# Altium PCB Voltage_Regulator_pcb.PcbDoc
Units mm, origin at the board's own origin, x right, y up, seen from the top; angles counter-clockwise.
Board outline 36 x 24.5 mm, 2 copper layers (Top Layer, Bottom Layer); 17 components, 9 nets, 38 pads, 7 vias.
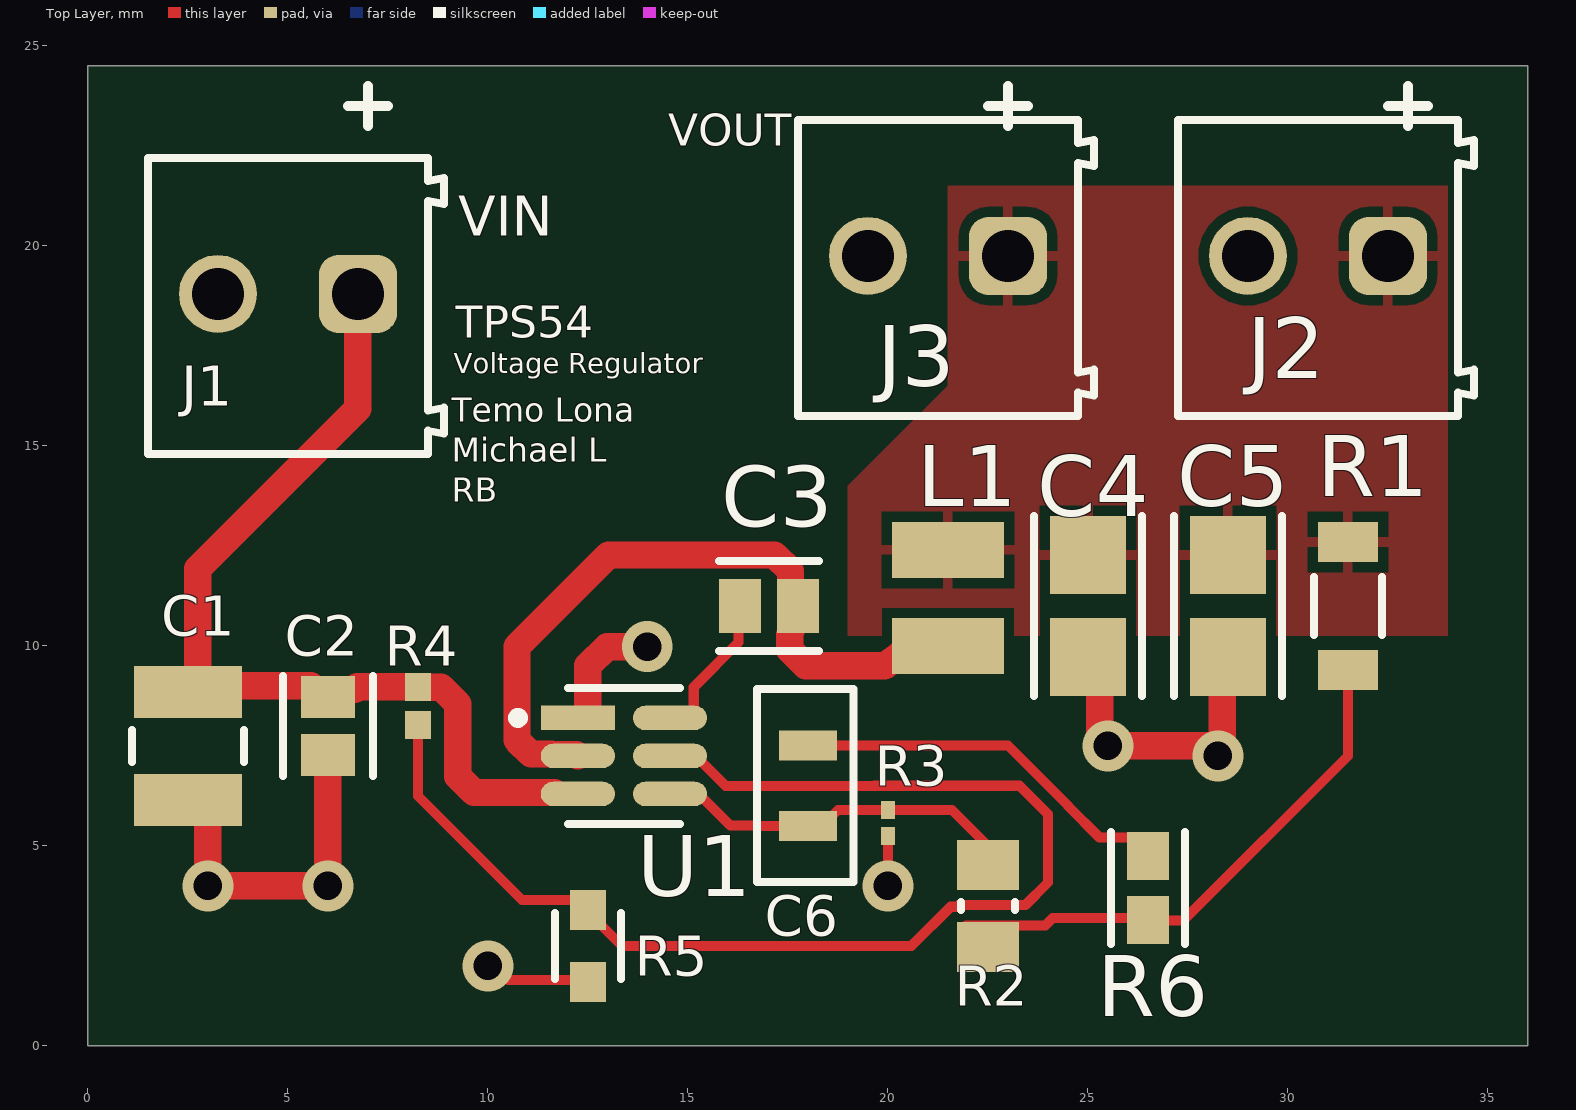
[diagram p0: Top Layer view]
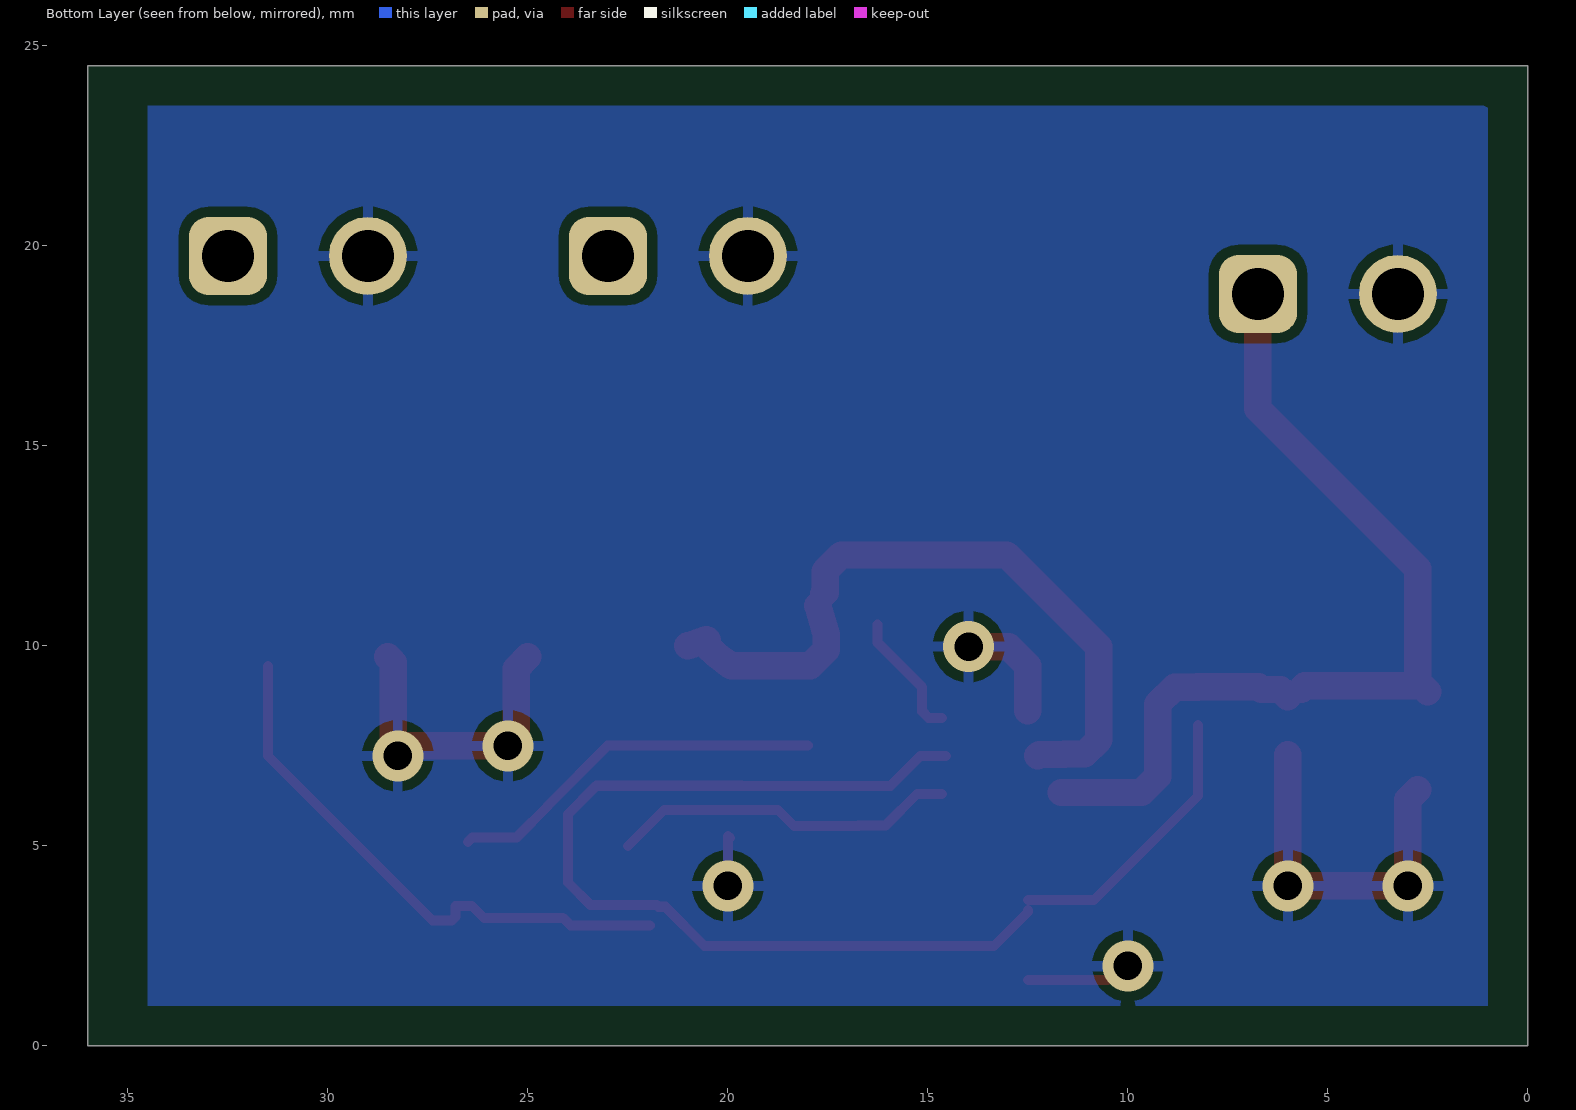
[diagram p1: Bottom Layer view, seen from below]
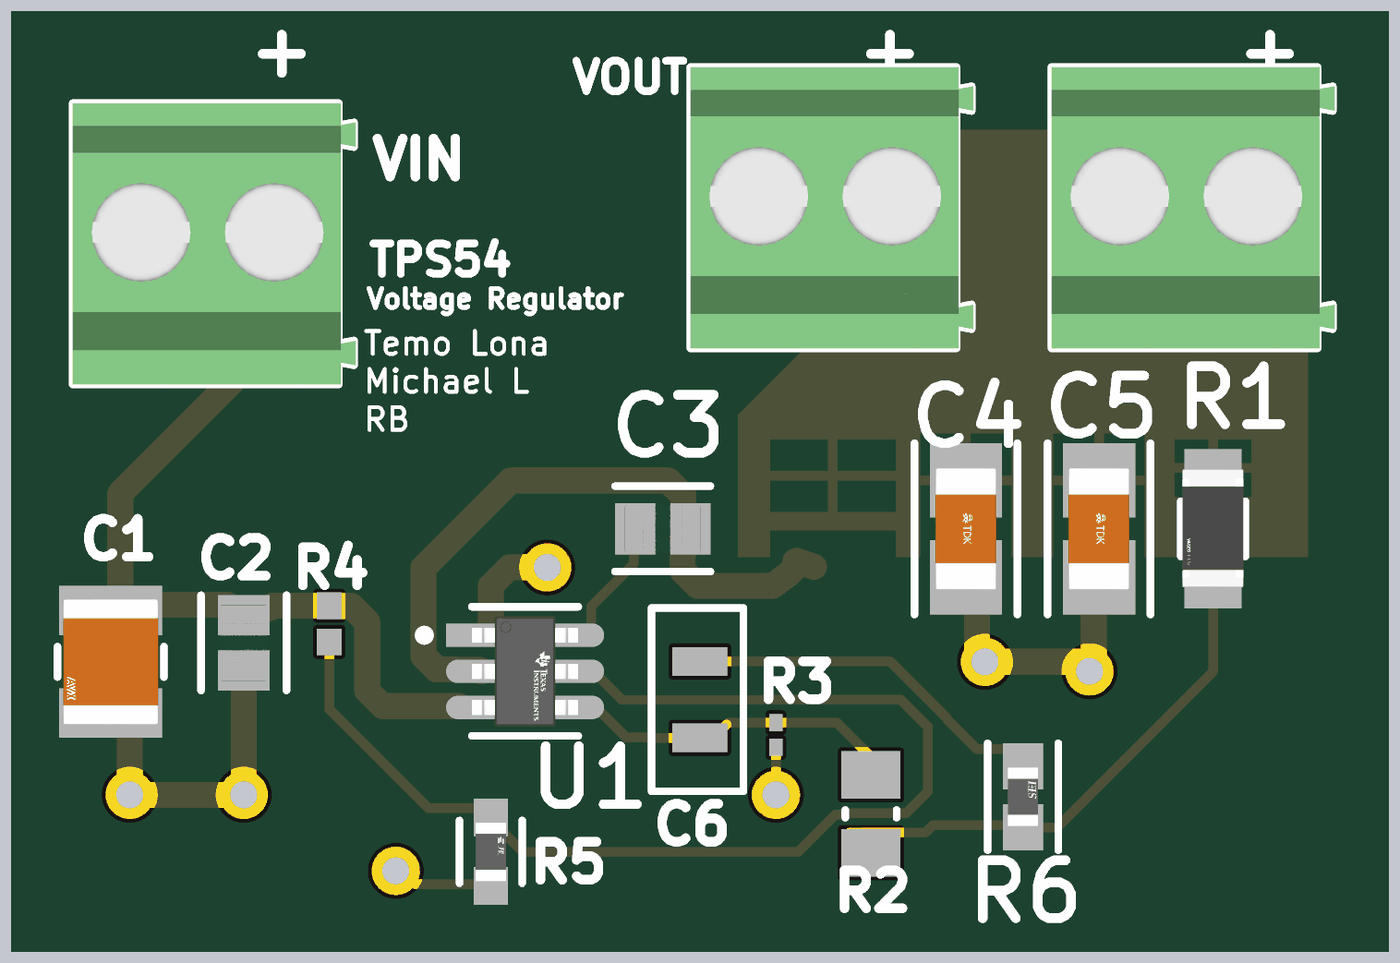
[diagram p2: 3D render of the assembled board from above, using the file's embedded part models]

## Layer stack, top to bottom
Top Solder: solder mask 0.0102, Solder Resist, Dk 3.5
Top Layer: signal copper 0.0356
Dielectric 1: dielectric 0.32, FR-4, Dk 4.8
Bottom Layer: signal copper 0.0356
Bottom Solder: solder mask 0.0102, Solder Resist, Dk 3.5

## Board outline
0,24.5 36,24.5 36,0 0,0

## Design rules (kind name [scope] priority, off if disabled: settings)
Clearance [All] p1: gap=0.254 ignorepadtopadclearanceinfootprint=FALSE except(0: Arc-Hole Track-Hole SMDPad-Hole THPad-Hole Via-Hole Fill-Hole Poly-Hole Region-Hole Text-Hole)
PolygonConnect [All] p1: connectstyle=Relief reliefconductorwidth=0.254 reliefentries=4 polygonreliefangle="90 Angle" airgapwidth=0.254
RoutingVias [All] p1: holewidth=0.711 width=1.27 viastyle="Through Hole" minholewidth=0.711 minwidth=1.27 maxholewidth=0.711 maxwidth=1.27
SolderMaskExpansion [All] p1: expansion=0.102 istentingtop=FALSE
Width [All] p1: maxlimit=0.254 minlimit=0.254 preferedwidth=0.254
30 further rules are at their usual default settings.

## Components (designator, comment, footprint, x,y, rotation, side; value= is the part's Value field where it differs from the comment)
C1 "12103G106ZAT2A" FP-1210-L_3_3_0_4-W_2_5_0-IPC_C 2.5,7.5 r270 top
C2 "CL21F104ZAANNNC" FP-CL21-IPC_C 6,8 r270 top
C3 "CL21F104ZAANNNC" FP-CL21-IPC_C 17.024,11 r0 top
C4 "C3216X6S0J226M160AB" FP-C3216-160-0_2-IPC_A 25,11 r270 top
C5 "C3216X6S0J226M160AB" FP-C3216-160-0_2-IPC_A 28.5,11 r270 top
C6 "75pF C" "75pF C" 18,7.51 r270 top
J1 "691214110002" 691214110002 5,18.5 r180 top
J2 "691214110002" 691214110002 30.75,19.45 r180 top
J3 "691214110002" 691214110002 21.25,19.45 r180 top
L1 "10uH" WE-LQ_1210 -1248.5,1281.2 r90 top
R1 "" FP-RT1206-MFG 31.5,11 r270 top value=49.9Ω
R2 "100k" RESC2013X50X30ML20T20 22.5,3.5 r270 top
R3 "13.3k" RESC0603X28X15NL05T05 20,5.575 r90 top
R4 "511k" RESC1005X40X25ML05T10 8.25,8.5 r90 top
R5 "105k" FP-CPF0603-MFG 12.5,2.5 r270 top value=105KΩ
R6 "2k" FP-RMCF0603-IPC_A 26.5,3.949 r90 top
U1 "TPS54308DDCT" FP-DDC0006A-IPC_A 13.4,7.25 r0 top (schematic designator U?)

## Footprints (in the part's own frame and the unit in brackets; to place one, negate y for a bottom-side part, rotate by r counter-clockwise, add the part's x,y. Pads: shape width x height; smd on the part's side, far side on the other; paste and mask are expansions set on the pad)
"75pF C" [mm]
  rect 0.75x1.45 smd: +(0,0) -(2.01,0)
  silkscreen extent -1.41,-1.27 3.42,1.14
691214110002 [mm] "3.50 mm Horizontal Entry Modular, 2p"
  rrect50% 1.95x1.95 hole 1.3: 1(-1.75,-0.3)
  round 1.95 hole 1.3: 2(1.75,-0.3)
  silkscreen extent -3.9,-3.7 3.5,3.7, body extent -3.95,-3.7 3.5,3.7, height 8.55
FP-1210-L_3_3_0_4-W_2_5_0-IPC_C [mm]
  rect 1.303x2.704 smd paste+0 mask+0: 1(-1.35,0) 2(1.35,0)
  silkscreen extent -0.4,-1.4 0.4,1.4, body extent -2.1,-1.5 2.1,1.5, height 0.25
FP-C3216-160-0_2-IPC_A [mm]
  rect 1.954x1.906 smd paste+0 mask+0: 1(-1.276,0) 2(1.276,0)
  silkscreen extent -2.25,-1.35 2.25,1.35, body extent -2.75,-1.45 2.75,1.45, height 0.25
FP-CL21-IPC_C [mm]
  rect 1.055x1.356 smd paste+0 mask+0: 1(-0.726,0) 2(0.726,0)
  silkscreen extent -1.25,-1.12 1.25,1.12, body extent -1.35,-0.82 1.35,0.82, height 0.25
FP-CPF0603-MFG [mm]
  rect 1x0.9 smd paste+0 mask+0: 1(-0.9,0) 2(0.9,0)
  silkscreen extent -0.82,-0.82 0.82,0.82, body extent -1.5,-0.55 1.5,0.55, height 0.25
FP-DDC0006A-IPC_A [mm]
  rect 1.854x0.612 smd paste+0 mask+0: 1(-1.15,0.95)
  rrect100% 1.854x0.612 smd paste+0 mask+0: 2(-1.15,0) 3(-1.15,-0.95) 4(1.15,-0.95) 5(1.15,0) 6(1.15,0.95)
  silkscreen extent -2.77,-1.7 1.4,1.7, body extent -2.58,-1.95 2.58,1.95, height 0.25
FP-RMCF0603-IPC_A [mm]
  rect 1.206x1.058 smd paste+0 mask+0: 1(-0.801,0) 2(0.801,0)
  silkscreen extent -1.4,-0.93 1.4,0.93, body extent -1.9,-1.03 1.9,1.03, height 0.25
FP-RT1206-MFG [mm]
  rect 1x1.5 smd paste+0 mask+0: 1(-1.6,0) 2(1.6,0)
  silkscreen extent -0.72,-0.85 0.72,0.85, body extent -2.2,-0.95 2.2,0.95, height 0.25
RESC0603X28X15NL05T05 [mm] "Chip Resistor, 2-Leads, Body 0.60x0.30mm, IPC Medium Density"
  rect 0.45x0.35 smd: 1(-0.325,0) 2(0.325,0)
  body extent -0.33,-0.17 0.33,0.18, height 0.28
RESC1005X40X25ML05T10 [mm] "Chip Resistor, 2-Leads, Body 1.00x0.50mm, IPC Low Density"
  rect 0.7x0.65 smd: 1(-0.475,0) 2(0.475,0)
  body extent -0.53,-0.27 0.53,0.28, height 0.4
RESC2013X50X30ML20T20 [mm] "Chip Resistor, 2-Leads, Body 2.00x1.25mm, IPC Low Density"
  rect 1.25x1.55 smd: 1(-1.025,0) gg(1.025,0)
  silkscreen extent -0.1,-0.67 0.1,0.67, body extent -1.1,-0.72 1.1,0.72, height 0.5
WE-LQ_1210 [mm] "SMT Inductor, body 3.2x2.5mm"
  rect 1.4x2.8 smd: 1(-1271.2,-1270) 2(-1268.8,-1270)
  body extent -1271.6,-1271.25 -1268.4,-1268.75, height 1.99

## Part data
C1: library part CMP-04427-006279-1, "General Purpose Ceramic Capacitor, 1210, 10uF, +80%/-20%, Y5V, +22%/-82%, 25V", Capacitance=10uF, Case Code (Imperial)=1210, Case Code (Metric)=3225, Dielectric=Y5V, Max Operating Temperature=85°C, Min Operating Temperature=-30°C, Package Quantity=2000, Tolerance=80%, Voltage Rating=25V, Case/Package=1210, Construction=Flat, Contact Plating=Tin, Depth=2.5mm, Lead Free="Lead Free", Length=3.2mm, Mount="Surface Mount", Number of Pins=2, Packaging="Tape and Reel", Radiation Hardening=No, REACH SVHC="No SVHC", RoHS Compliant=Yes, Series=1210, Termination=SMD/SMT, Thickness=0.09inch, Voltage Rating (DC)=25V, Width=0.098inch
C2 C3: library part CMP-13271-002094-1, "CL21 Series 0805 100nF 25V -20/+80% Tolerance Y5V Multilayer Ceramic Chip Capacitor", Capacitance=100nF, Case Code (Imperial)=0805, Case Code (Metric)=2012, Dielectric=Y5V, Max Operating Temperature=85°C, Min Operating Temperature=-30°C, Package Quantity=1, Tolerance=80%, Voltage Rating=25V, Case/Package=0805, Depth=1.25mm, Height=0.65mm, Lead Free="Lead Free", Length=2mm, Mount="Surface Mount", Packaging="Tape and Reel", Radiation Hardening=No, Thickness=0.03inch, Voltage Rating (DC)=25V, Width=0.049inch
C4 C5: library part CMP-08246-004893-1, "Multilayer Ceramic Capacitors 22uF ±20% 6.3V X6S SMD 1206", Capacitance=22uF, Case Code (Imperial)=1206, Case Code (Metric)=3216, Dielectric Material=Ceramic, Max Operating Temperature=105°C, Min Operating Temperature=-55°C, Package Quantity=2000, Tolerance=20%, Voltage Rating=6.3V, Case/Package=1206, Lead Free="Lead Free", Length=0.126inch, Mount="Surface Mount", Packaging="Tape and Reel", RoHS Compliant=Yes, Series=C, Thickness=0.071inch, Voltage Rating (DC)=6.3V, Width=0.063inch
J1 J2 J3: library part CMP-1502-02464-2, Color="Blue, Green", Current=10A, Max Operating Temperature=105°C, Min Operating Temperature=-40°C, Voltage=300V, Contact Material=Brass, Contact Plating="Brass, Tin", Current Rating=10A, Height=8.7mm, Housing Material=Nylon, Lead Pitch=3.5mm, Length=7.4mm, Mount="Through Hole", NexarPartId=18818288, Number of Contacts=2, Number of Levels=1, Number of Pins=2, Number of Positions Per Level=2, Number of Rows=1, Packaging=Box, Pitch=3.5052mm, Plating="Brass, Steel", REACH SVHC=Unknown, RoHS=Compliant, Stripping Length=-6mm, Termination=Screw, Voltage Rating=300V, Width=7.9mm, Wire Gauge (Max)=24AWG, Wire Gauge (Min)=16AWG, Wire/Cable Gauge=24AWG
L1: library part CMP-0227-00457-2, Ambient Temperature Range High=85°C, Ambient Temperature Range Low=-40°C, Case Code (Imperial)=1210, Case Code (Metric)=3225, Current Rating=320mA, DC Resistance (DCR)=650mΩ, Inductance=10µH, Inductance Tolerance=20%, Max Operating Temperature=125°C, Saturation Current=850mA, Self Resonant Frequency=20MHz, Test Frequency=1MHz, Case/Package=1210, Composition=Wirewound, Core Material=Ferrite, Height=2mm, Height - Seated (Max)=2.3114mm, Length=3.2mm, Max DC Current=320mA, Min Operating Temperature=-40°C, Mount="Surface Mount", NexarPartId=14415811, Packaging="Tape & Reel (TR)", Q Factor=35, REACH SVHC=Unknown, RMS Current (Irms)=320mA, RoHS=Compliant, Shielding=Unshielded, Termination=SMD/SMT, Tolerance=20%, Width=2.5mm
R1: library part CMP-03412-015593-1, "RES SMD 49.9 OHM 0.5% 1/4W 1206", Manufacturer=Yageo, Manufacturer Part Number=RT1206DRD0749R9L, Package=RT1206, Power Rating=0.25W, Resistance=49.9Ω, Temperature="-55°C to +155°C", Temperature Coefficient="25 ppm/°C", Temperature Range High=+155°C, Temperature Range Low=-55°C, Tolerance=0.0001, Voltage Rating=200V, Automotive=No, Category=Res, ComponentLink2Description=Datasheet, ComponentLink2URL=http://www.yageo.com/documents/recent/PYu-RT_1-to-0.01_RoHS_L_9.pdf, Composition="Thin Film", Device Class L1="Passive Components", Device Class L2=Resistors, Device Class L3="Chip SMD Resistors", Digikey Description="RES SMD 49.9 OHM 0.5% 1/4W 1206", Footprint Url=http://www.yageo.com/exep/pages/download/literatures/PYu-R_Mount_10.pdf, Height=0.65mm, Ipc Land Pattern Name=RESC310160X55, Lead Free=Yes, Mouser Description="Thin Film Resistors - SMD 1/4W 49.9 ohm .5% 25ppm", Octopart=https://octopart.com/rt1206drd0749r9l-yageo-1278218, RoHS=TRUE, Series=RT
R2: library part CMP-2001-04900-1, Manufacturer="Vishay Dale", Part Number=CRCW0805100KJNEA
R3: library part CMP-1010-00542-2, Manufacturer="Vishay Dale", Part Number=CRCW020113K3FKED
R4: library part CMP-2002-07728-1, Manufacturer="Yageo / Phycomp", Part Number=RC0402FR-07511KL
R5: library part CMP-03211-010980-1, "RES SMD 105KΩ 0.1% 1/16W 0603", Manufacturer="TE Connectivity", Manufacturer Part Number=CPF0603B105KE1, Package=CPF0603, Power Rating=0.063W, Resistance=105KΩ, Temperature="-55°C to +155°C", Temperature Coefficient=25ppm/°C, Temperature Range High=+155°C, Temperature Range Low=-55°C, Tolerance=0.1%, Voltage Rating=50V, Automotive=No, Category=Res, ComponentLink2Description=Datasheet, ComponentLink2URL=https://www.te.com/commerce/DocumentDelivery/DDEController?Action=showdoc&DocId=Data+Sheet%7F1773200%7FM%7Fpdf%7FEnglish%7FENG_DS_1773200_M.pdf%7F3-1676481-2, Composition="Thin Film", Device Class L1="Passive Components", Device Class L2=Resistors, Device Class L3="Chip SMD Resistors", Height=0.55mm, Ipc Land Pattern Name=RESC15580X45, Lead Free=Yes, Octopart=https://octopart.com/cpf0603b105ke1-te+connectivity-22739701, octopart_url=https://octopart.com/cpf0603b105ke1-te+connectivity-22739701, Packaging="1k Reel", RoHS=TRUE, Series=CPF
R6: library part CMP-26527-006357-1, "2kΩ ±1% 0.1W 0603 Thick Film Chip Resistor AEC-Q200 compliant", Case Code (Imperial)=0603, Case Code (Metric)=1608, Max Operating Temperature=155°C, Max Power Dissipation=100mW, Min Operating Temperature=-55°C, Resistance=2kR, Resistor Type="Thick Film", Temperature Coefficient=100ppm/°C, Tolerance=1%, Working Voltage=75V, Case/Package=0603, Construction=Rectangular, Contact Plating=Tin, Depth=0.8mm, Features="Automotive AEC-Q200", Height=0.022inch, Lead Free="Lead Free", Length=1.55mm, Military Standard=Not, Mount="Surface Mount", Number of Terminations=2, Packaging="Tape and Reel", Power Rating=100mW, Radiation Hardening=No, RoHS Compliant=Yes, Series=RMCF, Technology="THICK FILM", Width=0.031inch
U1: library part CMP-04918-000241-1, "IC REG BUCK ADJ 3A TSOT23-6", Case/Package=SOT-23-6, Max Input Voltage=28V, Max Operating Temperature=125°C, Max Output Voltage=26V, Min Input Voltage=4.5V, Min Operating Temperature=-40°C, Min Output Voltage=1V, Output Current=3A, Switching Frequency=350kHz, Mount="Surface Mount", Number of Outputs=1, Output Configuration=Positive, Output Type=Adjustable, Packaging="Tape and Reel", RoHS Compliant=Yes, Synchronous Rectifier=Yes

## Via types
v1: diameter 1.27, hole 0.711, Top Layer to Bottom Layer, 7 vias

## Nets (pads, with @x,y where several pads share a name; then routed paths per layer and width w, separated by ;. In a path a pad name is that pad's centre, name@x,y a point inside that pad or via, vN(x,y) a via of type N, cw(c..) or ccw(c..) an arc to the next point about the centre after c; other vN are vias at no path point)
GND: C1.2 C2.2 C4.2 C5.2 J1.2 J2.2 J3.2 R3.1 R5.2 U1.1 | length 23.1
  Top Layer w0.254: R3.1@19.952,5.202 R3.1
  Top Layer w0.256: v1(10,2) 10.158,2 10.508,1.65 R5.2@12.5,1.65 ; v1(20,4) R3.1
  Top Layer w0.686: C1.2@2.75,6.4 3,6.15 v1(3,4) v1(6,4) C2.2 ; U1.1@12.5,8.379 12.5,9.5 12.984,9.984 v1(13.984,9.984) ; C4.2 25.293,9.431 25.293,7.865 25.5,7.658 v1(25.5,7.5) v1@28,7.5 ; v1(28.25,7.25) 28.362,7.362 28.362,9.586 C5.2
NetC3_1: C3.1 U1.6 | length 3.2
  Top Layer w0.254: U1.6@14.65,8.2 14.979,8.2 15.144,8.365 15.144,8.969 16.265,10.09 C3.1@16.265,10.528
NetC3_2: C3.2 L1.1 U1.2 | length 17.7
  Top Layer w0.684: U1.2 12.214,7.286 11.593,7.286 11.581,7.298 11.076,7.298 10.727,7.647 10.727,9.977 13.024,12.274 17.164,12.274 17.565,11.873 17.565,11.336 C3.2@17.6,11.301 ; C3.2 17.569,10.374 17.542,10.281 17.542,10.184 17.542,9.901 17.742,9.7 17.943,9.5 19.915,9.5 cw(c20.33,8.957) 19.972,9.539 20.308,9.792 20.512,9.996 20.512,10.142 20.545,10.158 L1.1@21,10
NetC6_+: C6.+ R6.2 | length 9.5
  Top Layer w0.254: C6.+ 23.002,7.51 24.5,6.012 24.5,6 25.294,5.206 26.396,5.206 R6.2@26.5,5.102
NetC6_-: C6.- R2.1 R3.2 U1.4 | length 8.7
  Top Layer w0.254: U1.4@14.65,6.3 15.271,6.3 16.063,5.508 16.729,5.508 16.737,5.5 C6.- 18.35,5.5 18.75,5.9 R3.2 21.6,5.9 R2.1@22.5,5
NetR1_2: R1.2 R2.gg R6.1 | length 14
  Top Layer w0.254: R2.gg@21.954,3.011 23.932,3.011 24.121,3.2 26.098,3.2 26.398,3.5 26.812,3.5 26.812,3.226 26.902,3.136 27.386,3.136 31.5,7.25 R1.2@31.5,9.5
NetR4_1: R4.1 R5.1 U1.5 | length 31.4
  Top Layer w0.254: R4.1 8.25,6.25 10.85,3.65 R5.1@12.5,3.65 ; R5.1 12.5,3.35 13.35,2.5 20.586,2.5 21.567,3.481 21.731,3.481 21.769,3.519 23.433,3.519 24,4.086 24,5.794 23.288,6.506 19.667,6.506 19.661,6.5 15.943,6.5 15.193,7.25 U1.5
Vin: C1.1 C2.1 J1.1 R4.2 U1.3 | length 22.5
  Top Layer w0.684: C1.1 2.65,9 5.575,9 C2.1@5.664,8.911 ; C1.1@2.75,9.1 2.75,11.925 6.75,15.925 J1.1 ; C2.1 6.185,8.911 6.673,8.911 6.737,8.975 R4.2 8.254,8.971 8.828,8.971 9.25,8.549 9.25,6.737 9.651,6.336 U1.3@11.665,6.336
Vout: C4.1 C5.1 J2.1 J3.1 L1.2 R1.1

## Polygon pours and split planes (outlines as drawn)
Vout on Top Layer "VOUT_L01_P001" (solid, pour order 1): 21.5,21.5 34,21.5 34,10.25 19,10.25 19,14 21.5,16.5
GND on Bottom Layer "GND_L02_P000" (solid, pour order 0): 0.967,23.49 1,23.457 1,1 34.5,1 34.5,23.5 1,23.5

## Silkscreen, mask and mechanical layers (free items; w line width, h text height)
Top Overlay:
  lines w0.254: 7,24 7,23 7,23.5 6.5,23.5 7.5,23.5 ; 23,24 23,23 23,23.5 22.5,23.5 23.5,23.5 ; 33,24 33,23 33,23.5 32.5,23.5 33.5,23.5
  text "VOUT" at 14.504,22.504 h0.8
  text "VIN" at 9.254,20.254 h1
  text "TPS54" at 9.2,17.7 h0.8
  text "Voltage Regulator" at 9.15,16.817 h0.5
  text "Temo Lona" at 9.1,15.6 h0.6
  text "Michael L" at 9.1,14.6 h0.6
  text "RB" at 9.1,13.6 h0.6
board Outline:
  the board outline again, w0.254